# Altium PCB Sandbox.PcbDoc
Units mm, origin at the board's own origin, x right, y up, seen from the top; angles counter-clockwise.
Board outline 240 x 130 mm, 2 copper layers (Top Layer, Bottom Layer); 24 components, 13 nets, 48 pads, 5 vias.
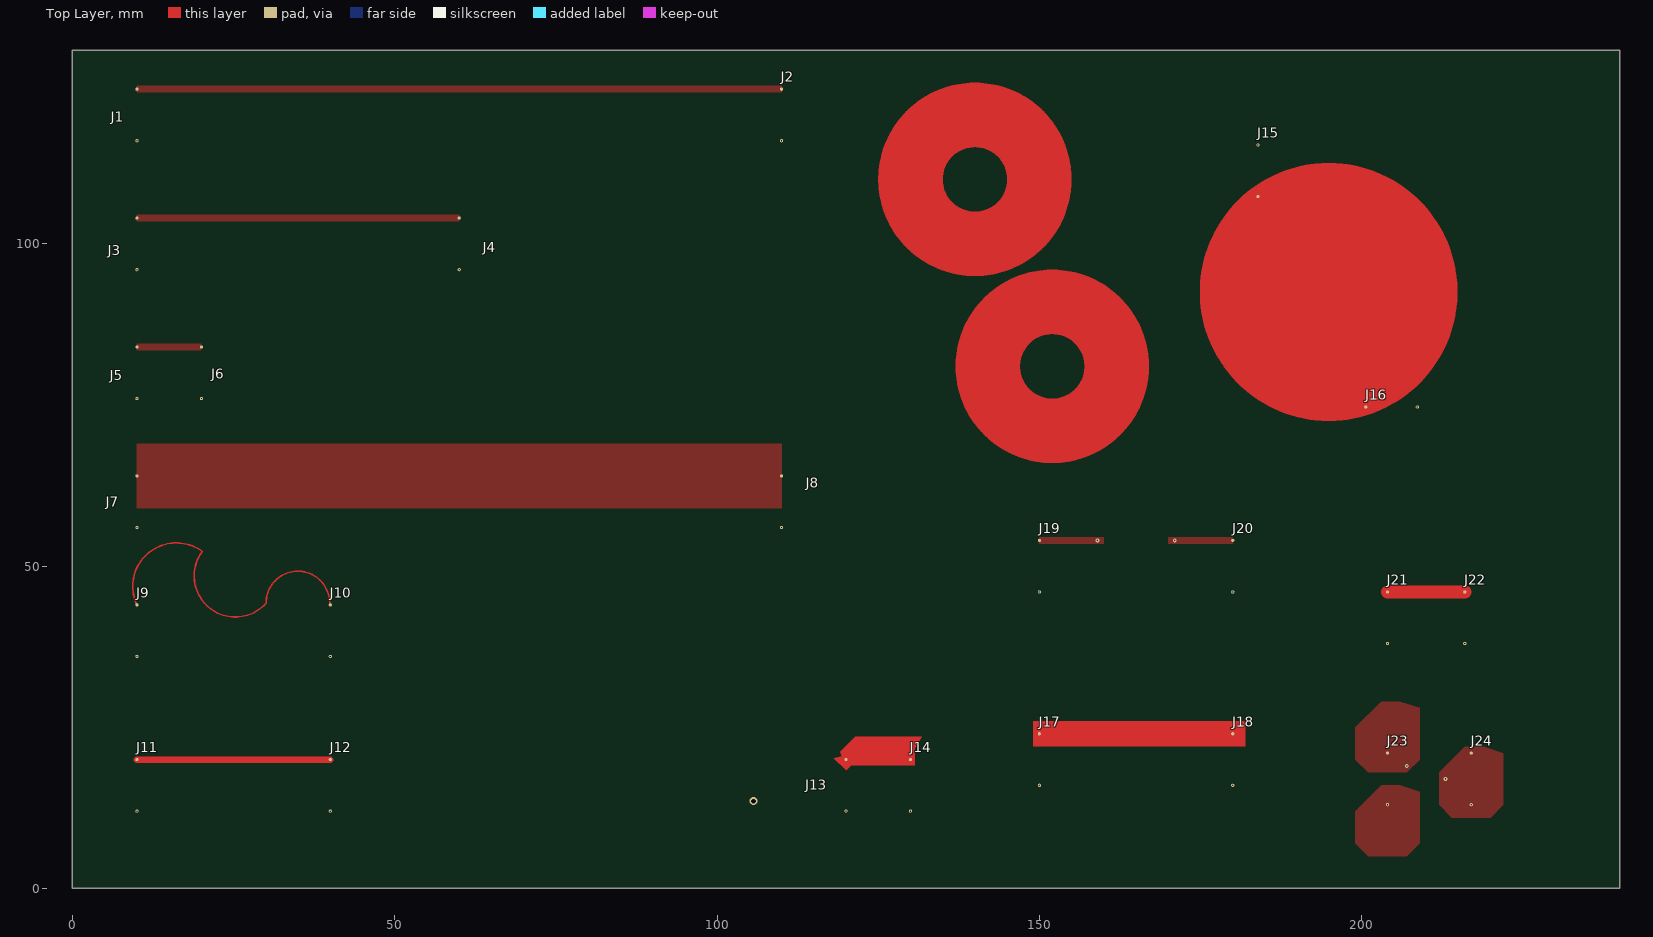
[diagram p0: Top Layer view]
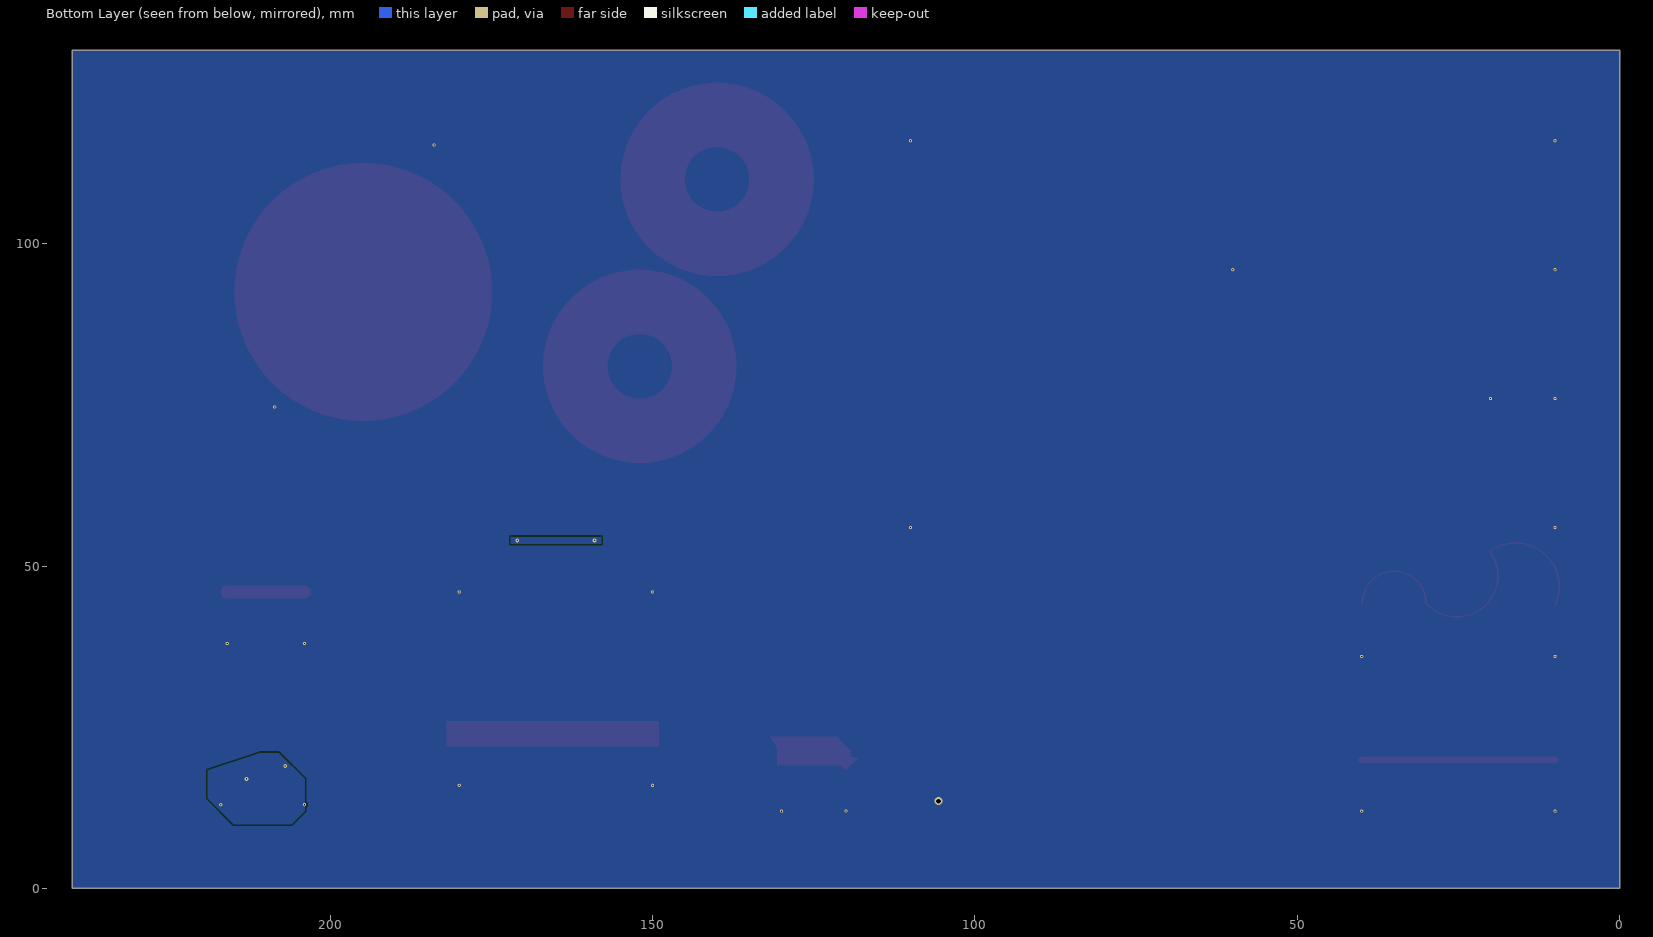
[diagram p1: Bottom Layer view, seen from below]

## Layer stack, top to bottom
Top Solder: solder mask 0.0102, Solder Resist, Dk 3.5
Top Layer: signal copper 0.0356
Dielectric 1: dielectric 0.32, FR-4, Dk 4.8
Bottom Layer: signal copper 0.0356
Bottom Solder: solder mask 0.0102, Solder Resist, Dk 3.5

## Board outline
0,0 0,130 240,130 240,0

## Design rules (kind name [scope] priority, off if disabled: settings)
Clearance [All] p1: gap=0.254 ignorepadtopadclearanceinfootprint=FALSE
PolygonConnect [All] p1: connectstyle=Direct reliefconductorwidth=0.254 reliefentries=4 polygonreliefangle="90 Angle" airgapwidth=0.254
RoutingVias [All] p1: holewidth=0.711 width=1.27 viastyle="Through Hole" minholewidth=0.711 minwidth=1.27 maxholewidth=0.711 maxwidth=1.27
SolderMaskExpansion [All] p1: expansion=0.102 istentingtop=FALSE
Width [All] p1: maxlimit=0.254 minlimit=0.254 preferedwidth=0.254
30 further rules are at their usual default settings.

## Components (designator, comment, footprint, x,y, rotation, side; value= is the part's Value field where it differs from the comment)
J1 "test_connector" test_connector_footprint 10,120 r270 top
J2 "test_connector" test_connector_footprint 110,120 r270 top
J3 "test_connector" test_connector_footprint 10,100 r270 top
J4 "test_connector" test_connector_footprint 60,100 r270 top
J5 "test_connector" test_connector_footprint 10,80 r270 top
J6 "test_connector" test_connector_footprint 20,80 r270 top
J7 "test_connector" test_connector_footprint 10,60 r270 top
J8 "test_connector" test_connector_footprint 110,60 r270 top
J9 "test_connector" test_connector_footprint 10,40 r270 top
J10 "test_connector" test_connector_footprint 40,40 r270 top
J11 "test_connector" test_connector_footprint 10,16 r270 top
J12 "test_connector" test_connector_footprint 40,16 r270 top
J13 "test_connector" test_connector_footprint 120,16 r270 top
J14 "test_connector" test_connector_footprint 130,16 r270 top
J15 "test_connector" test_connector_footprint 183.895,111.34 r90 top
J16 "test_connector" test_connector_footprint 204.634,74.688 r0 top
J17 "test_connector" test_connector_footprint 150,20 r270 top
J18 "test_connector" test_connector_footprint 180,20 r270 top
J19 "test_connector" test_connector_footprint 150,50 r270 top
J20 "test_connector" test_connector_footprint 180,50 r270 top
J21 "test_connector" test_connector_footprint 204,42 r270 top
J22 "test_connector" test_connector_footprint 216,42 r270 top
J23 "test_connector" test_connector_footprint 204,17 r270 top
J24 "test_connector" test_connector_footprint 217,17 r270 top

## Footprints (in the part's own frame and the unit in brackets; to place one, negate y for a bottom-side part, rotate by r counter-clockwise, add the part's x,y. Pads: shape width x height; smd on the part's side, far side on the other; paste and mask are expansions set on the pad)
test_connector_footprint [mm]
  round 0.5 smd: 1(-4,0)
  round 0.5 hole 0.2: 2(4,0)

## Part data
J1 J2 J3 J4 J5 J6 J7 J8 J9 J10 J11 J12 J13 J14 J15 J16 J17 J18 J19 J20 J21 J22 J23 J24: library part test_conn, "for playing around with", Manufacturer="Phoenix Contact", Manufacturer Part Number=1729128, Component Type=Connectors
  J1: PDN_N_NET=GND, PDN_P_NET=P1V_1W100L, PDN_ROLE=SOURCE, PDN_V=1
  J2: PDN_I=1, PDN_N_NET=GND, PDN_P_NET=P1V_1W100L, PDN_ROLE=SINK
  J3: PDN_N_NET=GND, PDN_P_NET=P1V_1W50L, PDN_ROLE=SOURCE, PDN_V=1
  J4: PDN_I=1, PDN_N_NET=GND, PDN_P_NET=P1V_1W50L, PDN_ROLE=SINK
  J5: PDN_N_NET=GND, PDN_P_NET=P1V_1W10L, PDN_ROLE=SOURCE, PDN_V=1
  J6: PDN_I=1, PDN_N_NET=GND, PDN_P_NET=P1V_1W10L, PDN_ROLE=SINK
  J7: PDN_N_NET=GND, PDN_P_NET=P1V_10W100L, PDN_ROLE=SOURCE, PDN_V=1
  J8: PDN_I=1, PDN_N_NET=GND, PDN_P_NET=P1V_10W100L, PDN_ROLE=SINK
  J9: PDN_N_NET=GND, PDN_P_NET=P1V_ARC, PDN_ROLE=SOURCE, PDN_V=1
  J10: PDN_I=1, PDN_MIN_V=0.95, PDN_N_NET=GND, PDN_P_NET=P1V_ARC, PDN_ROLE=SINK
  J11: PDN_N_NET=GND, PDN_P_NET=P1V_TRACE, PDN_ROLE=SOURCE, PDN_V=1
  J12: PDN_I=1, PDN_N_NET=GND, PDN_P_NET=P1V_TRACE, PDN_ROLE=SINK
  J13: PDN_N_NET=GND, PDN_P_NET=P1V_REGION, PDN_ROLE=SOURCE, PDN_V=1
  J14: PDN_I=1, PDN_N_NET=GND, PDN_P_NET=P1V_REGION, PDN_ROLE=SINK
  J17: PDN_N_NET=GND, PDN_P_NET=P1V_FILL, PDN_ROLE=SOURCE, PDN_V=1
  J18: PDN_I=1, PDN_N_NET=GND, PDN_P_NET=P1V_FILL, PDN_ROLE=SINK
  J19: PDN_N_NET=GND, PDN_P_NET=P1V_VIA, PDN_ROLE=SOURCE, PDN_V=1
  J20: PDN_I=1, PDN_N_NET=GND, PDN_P_NET=P1V_VIA, PDN_ROLE=SINK
  J21: PDN_NET=P1V_SINGLE_NET, PDN_ROLE=SOURCE, PDN_V=1
  J22: PDN_I=1, PDN_NET=P1V_SINGLE_NET, PDN_ROLE=SINK
  J23: PDN_PINS=1, PDN_ROLE=SOURCE, PDN_V=1
  J24: PDN_I=1, PDN_NET=P1V_VIAS, PDN_ROLE=SINK

## Via types
v1: diameter 0.6, hole 0.2, Top Layer to Bottom Layer, 4 vias
v2: diameter 1.27, hole 0.711, Top Layer to Bottom Layer, 1 vias

## Nets (pads, with @x,y where several pads share a name; then routed paths per layer and width w, separated by ;. In a path a pad name is that pad's centre, name@x,y a point inside that pad or via, vN(x,y) a via of type N, cw(c..) or ccw(c..) an arc to the next point about the centre after c; other vN are vias at no path point)
GND: J1.2 J2.2 J3.2 J4.2 J5.2 J6.2 J7.2 J8.2 J9.2 J10.2 J11.2 J12.2 J13.2 J14.2 J15.2 J16.2 J17.2 J18.2 J19.2 J20.2 J21.2 J22.2
  other v2: 105.652,13.553
P1V_1W10L: J5.1 J6.1
P1V_1W50L: J3.1 J4.1
P1V_1W100L: J1.1 J2.1
P1V_10W100L: J7.1 J8.1
P1V_ARC: J9.1 J10.1 | length 53.1
  Top Layer w0.254: J9.1 cw(c16.055,46.876) 10.668,50.866 cw(c16.107,46.838) 20.136,52.276 ccw(c25.257,48.483) 30.035,44.267 cw(c34.964,44.29) J10.1@39.885,44.007
P1V_FILL: J17.1 J18.1
P1V_MANUAL: J15.1 J16.1 | length 62.8
  Top Layer w20: 204.881,92.539 ccw(c194.881,92.539) 204.881,92.539
P1V_REGION: J13.1 J14.1
P1V_SINGLE_NET: J21.1 J22.1 | length 12
  Top Layer w2: J21.1 J22.1
P1V_TRACE: J11.1 J12.1 | length 30
  Top Layer w1: J11.1 J12.1
P1V_VIA: J19.1 J20.1
  other v1: 159,54 171,54
P1V_VIAS: J23.1 J23.2 J24.1 J24.2
  other v1: 213,17 207,19
copper on no net: | length 125.7
  Top Layer w10: 150,110 ccw(c140,110) 150,110 ; 162,81 ccw(c152,81) 162,81

## Polygon pours and split planes (outlines as drawn)
P1V_VIAS on Top Layer "-2V5_PG" (solid, pour order 26): 219,22 216,22 212,18 212,13 214,11 220,11 222,13 222,21
P1V_VIAS on Top Layer "-2V5_PG" (solid, pour order 25): 206,16 203,16 199,12 199,7 201,5 207,5 209,7 209,15
P1V_VIAS on Top Layer "-2V5_PG" (solid, pour order 24): 206,29 203,29 199,25 199,20 201,18 207,18 209,20 209,28
P1V_VIA on Top Layer "-2V5_PG" (solid, pour order 21): 180,53.5 180,54.5 170,54.5 170,53.5
P1V_VIA on Top Layer "-2V5_PG" (solid, pour order 20): 150,53.5 150,54.5 160,54.5 160,53.5
P1V_10W100L on Top Layer "-2V5_PG" (solid, pour order 19): 10,59 10,69 110,69 110,59
P1V_1W10L on Top Layer "-2V5_PG" (solid, pour order 18): 10,83.5 10,84.5 20,84.5 20,83.5
P1V_1W50L on Top Layer "-2V5_PG" (solid, pour order 17): 10,103.5 10,104.5 60,104.5 60,103.5
P1V_1W100L on Top Layer "-2V5_PG" (solid, pour order 16): 10,123.5 10,124.5 110,124.5 110,123.5
P1V_VIAS on Bottom Layer "-2V5_PG" (solid, pour order 23): 211,21 208,21 204,17 204,12 206,10 215,10 219,14 219,18.333
P1V_VIA on Bottom Layer "-2V5_PG" (solid, pour order 22): 172,53.5 172,54.5 158,54.5 158,53.5
GND on Bottom Layer "GND_L02_P027" (solid, pour order 27): 0,0 0,130 240,130 240,0

## Other copper
Top Layer:
  rectangle net P1V_FILL: 149,22 182,26
  region net P1V_REGION: 119.334,20.54 118.127,20.222 120.032,18.317 120.794,19.079 130.7,19.079 130.7,19.968 130.7,21.746 131.716,23.524 121.429,23.524 119.143,21.238

## Silkscreen, mask and mechanical layers (free items; w line width, h text height)
Board:
  the board outline again, w0.1